# Altium PCB main_old.PcbDoc (part 12 of 15)
Units mil, origin at the board's own origin, x right, y up, seen from the top; angles counter-clockwise.
Board outline 8394.55 x 5164.44 mil, 7 copper layers (Top Layer 1, Layer 2, Layer 3, Unused, Layer 4_pow, Layer 5_gnd, Bottom 6+gnd), stack 46.112 mil thick; 363 components, 409 nets, 1750 pads, 991 vias.
Unrouted connection lines stored in the file: 1.
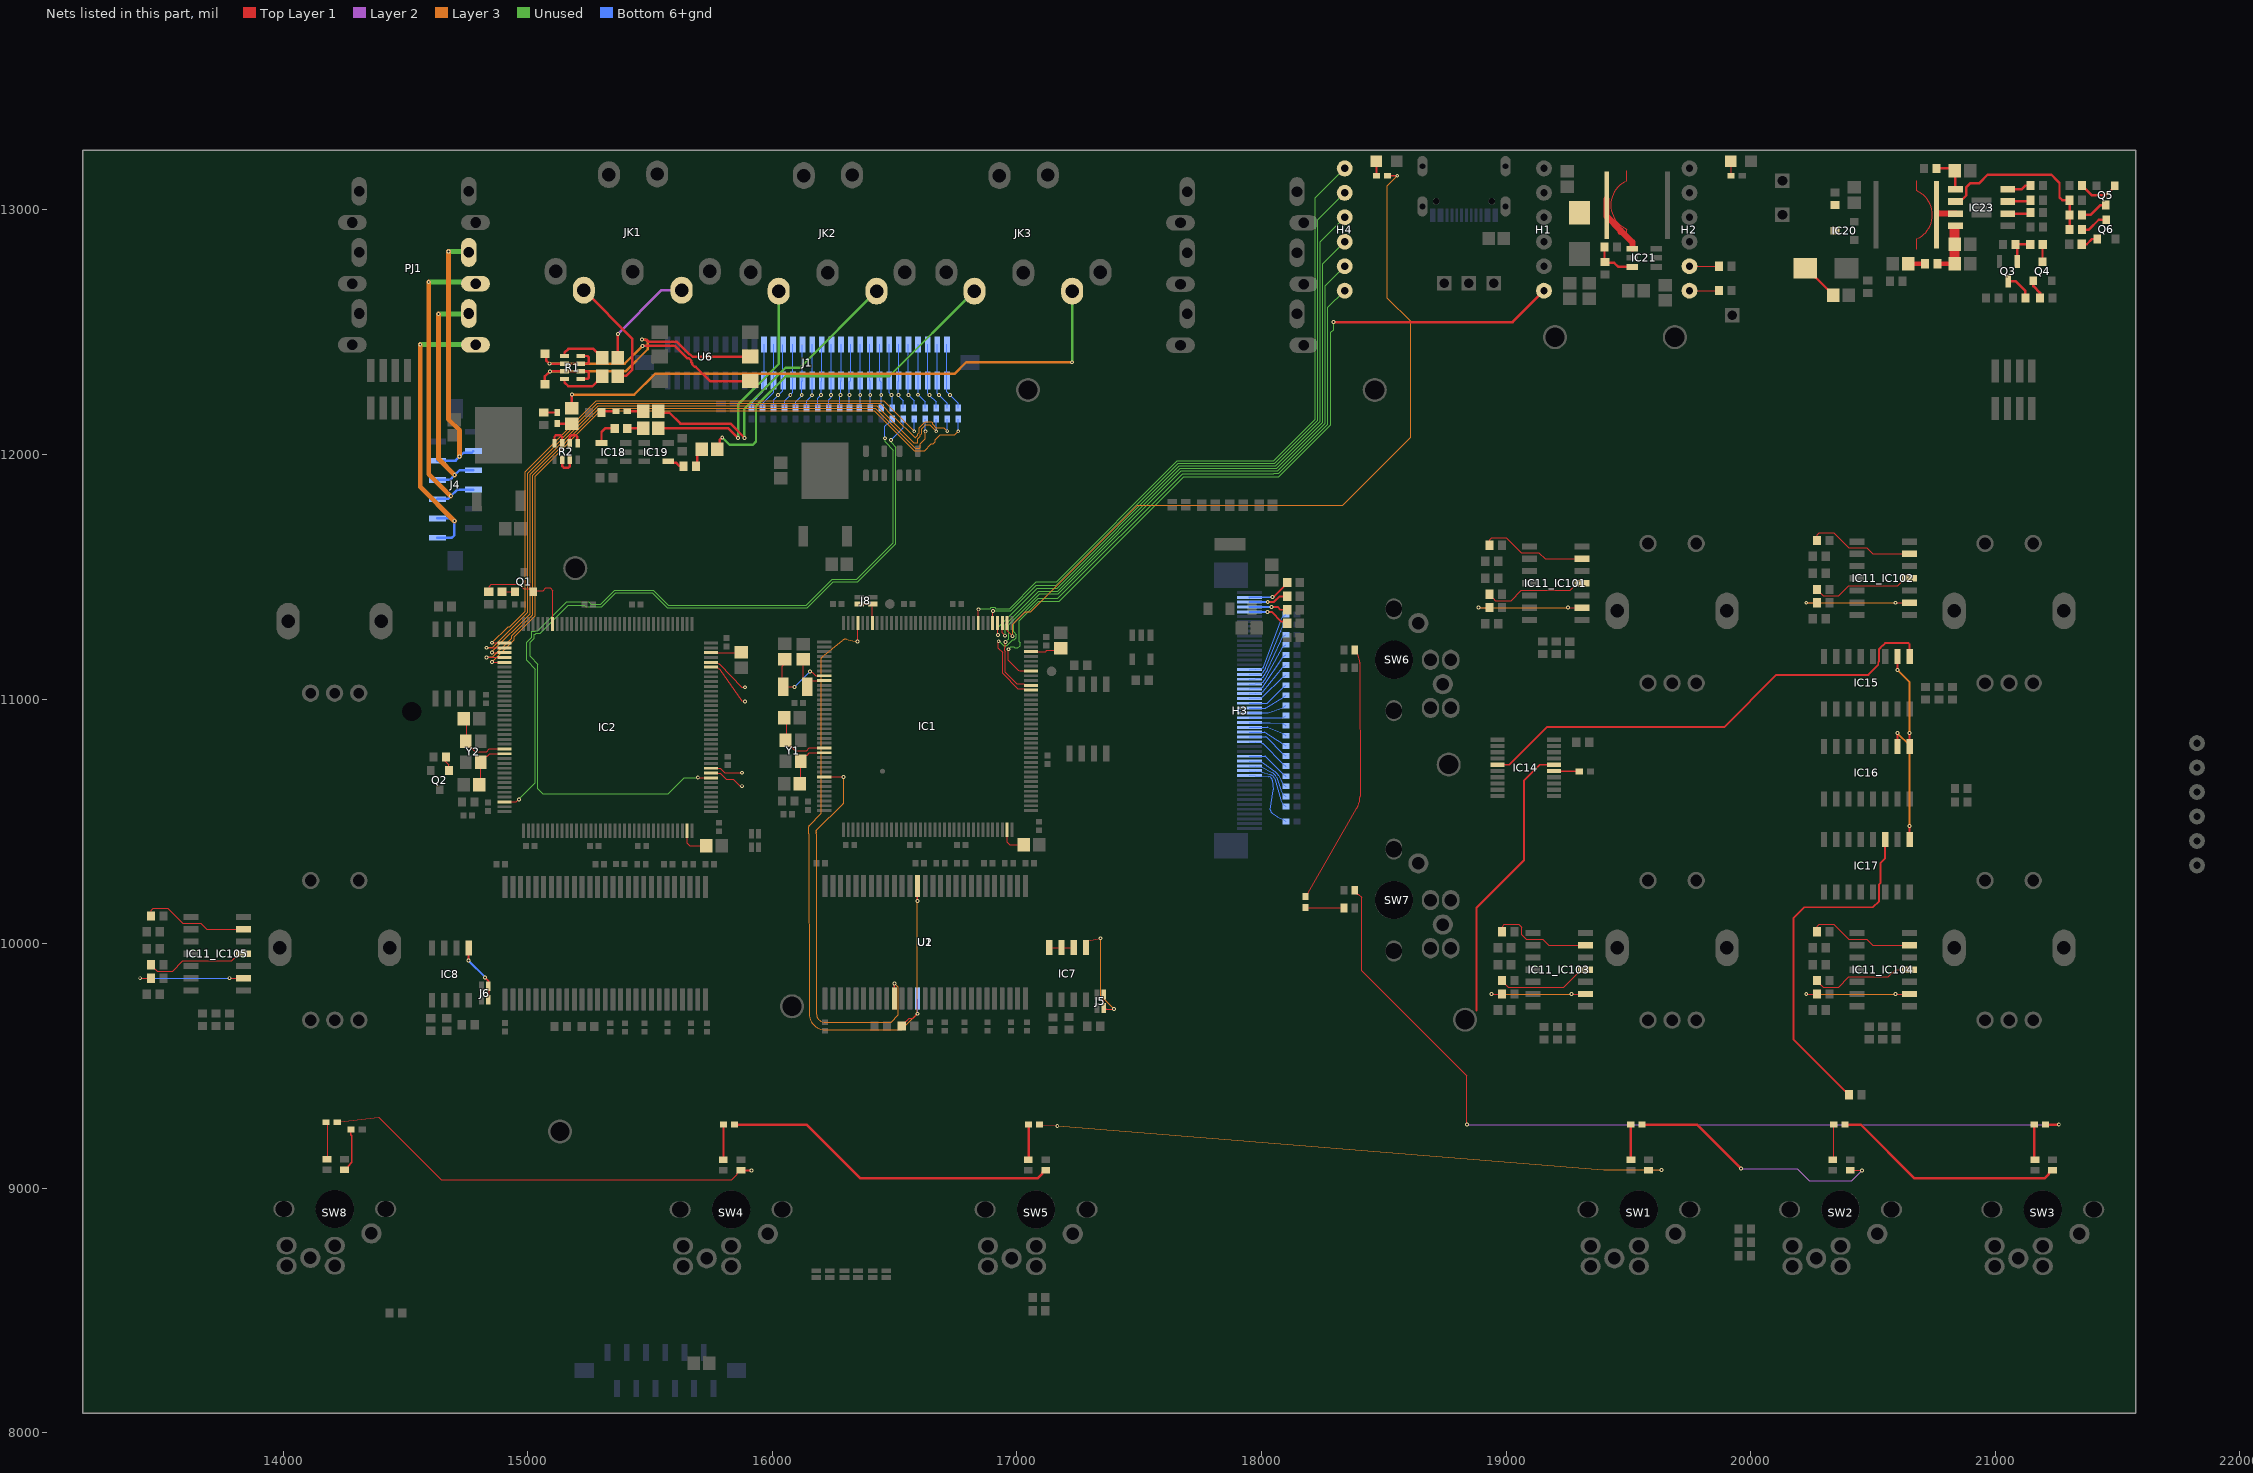
[diagram p15: the nets of this part, all layers, seen from the top]

## Via types
v1: diameter 15.75, hole 7.87, Top Layer 1 to Bottom 6+gnd, tented both sides, 923 vias
v2: diameter 27.56, hole 11.81, Top Layer 1 to Bottom 6+gnd, 45 vias
v3: diameter 23.62/23.62/23.62/23.62/23.62/23.62/23.62 (per signal layer), hole 12, Top Layer 1 to Bottom 6+gnd, tented top, 10 vias
v4: diameter 15.75, hole 7.87, Top Layer 1 to Bottom 6+gnd, 10 vias
v5: diameter 23.62/23.62/23.62/23.62/23.62/23.62/23.62 (per signal layer), hole 12, Top Layer 1 to Bottom 6+gnd, tented bottom, 3 vias

## Nets (pads, with @x,y where several pads share a name; then routed paths per layer and width w, separated by ;. In a path a pad name is that pad's centre, name@x,y a point inside that pad or via, vN(x,y) a via of type N, cw(c..) or ccw(c..) an arc to the next point about the centre after c; other vN are vias at no path point) (continued)
LDQM_6: IC1.141 R7.2 U1.15 U2.15 | length 3172.6
  Top Layer 1 w5: v1(16347.28,11235.1) 16348.42,11236.24 16348.42,11310.43 IC1.141@16349.57,11311.57 ; R7.2@16528.82,9663.82 16528.82,9665.79 16558.76,9695.73 16575.49,9695.73 v1(16593.26,9713.5) ; v1(16593.26,10174.13) U1.15@16593.26,10235.97 ; v1@16593.5,10174.38 U1.15@16593.5,10236.22
  Layer 3 w5: 16202.51,11170.57 16288.48,11241.21 ; 16202.51,11170.58 ccw(c16205.68,11166.71) 16200.68,11166.71 16200.68,10533.17 16150.01,10482.5 ccw(c16153.55,10478.97) 16148.55,10478.97 16148.55,10450.26 16150.05,9713.46 ccw(c16215.42,9713.62) 16215.17,9648.24 16246.56,9648.13 16481.47,9647.93 ; v1(16347.28,11235.1) 16301.28,11244.4 ; 16481.48,9647.93 16525.62,9647.93 ccw(c16525.62,9652.93) 16529.15,9649.4 v1(16593.26,9713.5) v1(16593.26,10174.13) ; 16288.48,11241.21 cw(c16298.24,11229.33) 16301.28,11244.4 ; 16288.48,11241.21 cw(c16298.24,11229.33) 16301.28,11244.4 ; 16288.48,11241.21 cw(c16298.24,11229.33) 16301.28,11244.4 ; 16288.48,11241.21 cw(c16298.24,11229.33) 16301.28,11244.4 ; 16288.48,11241.21 cw(c16298.24,11229.33) 16301.28,11244.4 ; 16288.48,11241.21 cw(c16298.24,11229.33) 16301.28,11244.4 ; 16288.48,11241.21 cw(c16298.24,11229.33) 16301.28,11244.4 ; 16288.48,11241.21 cw(c16298.24,11229.33) 16301.28,11244.4 ; 16288.48,11241.21 cw(c16298.24,11229.33) 16301.28,11244.4 ; 16288.48,11241.21 cw(c16298.24,11229.33) 16301.28,11244.4 ; 16288.48,11241.21 cw(c16298.24,11229.33) 16301.28,11244.4 ; 16288.48,11241.21 cw(c16298.24,11229.33) 16301.28,11244.4 ; 16288.48,11241.21 cw(c16298.24,11229.33) 16301.28,11244.4 ; 16288.48,11241.21 cw(c16298.24,11229.33) 16301.28,11244.4 ; 16288.48,11241.21 cw(c16298.24,11229.33) 16301.28,11244.4 ; 16288.48,11241.21 cw(c16298.24,11229.33) 16301.28,11244.4
  Bottom 6+gnd w5: v1@16593.5,9713.75 U2.15@16593.5,9775.59
LED_REAR: IC1.110 R138.2 | length 3222.5
  Top Layer 1 w5: IC1.110@16959.8,11311.57 16959.8,11279.49 v1(16982.09,11257.2)
  Top Layer 1 w8: R138.2@18515.28,13140 v1(18555,13140)
  Layer 3 w5: v1(16982.09,11257.2) 16982.09,11306.23 17033.14,11357.28 17056.45,11357.28 17491.19,11792.02 18332.02,11792.02 18610,12070 18610,12545 18515,12640 18515,13100 v1(18555,13140)
MISO: IC14.5 IC15.9 | length 1980
  Top Layer 1 w8: IC14.5@18964.33,10731.61 19012.8,10731.61 19166.87,10885.69 19891.87,10885.69 20105,11098.82 20481.04,11098.82 20521.8,11139.58 20521.8,11150.61 20525,11153.82 20525,11204.85 20538.58,11218.44 20539.62,11218.44 20550,11228.82 20645,11228.82 20650,11223.82 IC15.9@20650,11173.82
MOSI: IC14.16 | length 1170.6
  Top Layer 1 w8: 18878.99,9726.04 18878.99,10146.05 19073,10340.05 19073,10666.82 19137.8,10731.61 IC14.16@19195.67,10731.61
NetC1_1: C1.1 IC1.106 | length 127.8
  Top Layer 1 w5: IC1.106@17057.76,11193.94 17116.83,11193.94 17122.4,11199.51 17172.19,11199.51 C1.1@17180,11207.32
NetC2_1: C2.1 IC2.106 | length 127.8
  Top Layer 1 w5: IC2.106@15749.52,11189.75 15858.37,11189.75 C2.1@15871.76,11203.13
NetC3_2: C3.2 IC1.23 Y1.1 | length 277.5
  Top Layer 1 w5: C3.2@16058.5,10923.82 16058.5,10837.13 Y1.1@16053.5,10832.13 16053.5,10828.19 16092.87,10788.82 16140,10788.82 16151.42,10800.24 IC1.23@16212.24,10800.24
NetC4_2: C4.2 IC2.23 Y2.1 | length 277.5
  Top Layer 1 w5: C4.2@14750.26,10919.63 14750.26,10832.94 Y2.1@14745.26,10827.94 14745.26,10824 14784.63,10784.63 14831.76,10784.63 14843.18,10796.05 IC2.23@14904,10796.05
NetC5_2: C5.2 IC1.24 Y1.3 | length 204.3
  Top Layer 1 w5: C5.2@16116.5,10653.82 Y1.3@16116.5,10745.51 16116.5,10749.45 16137.62,10770.57 16141.56,10770.57 16151.54,10780.55 IC1.24@16212.24,10780.55
NetC6_2: C6.2 IC2.24 Y2.3 | length 204.3
  Top Layer 1 w5: C6.2@14808.26,10649.63 Y2.3@14808.26,10741.32 14808.26,10745.26 14829.38,10766.38 14833.31,10766.38 14843.29,10776.36 IC2.24@14904,10776.36
NetC9_2: C9.2 IC1.71 | length 135.2
  Top Layer 1 w5: IC1.71@16960,10466.26 IC1.71@16959.8,10466.06 16959.8,10414.01 16970,10403.82 C9.2@17038.5,10403.82
NetC10_2: C10.2 IC2.71 | length 135
  Top Layer 1 w5: IC2.71@15651.56,10461.87 15651.56,10409.83 15661.76,10399.63 C10.2@15730.26,10399.63
NetC67_2: C67.2 IC1.8 Y3.2 | length 296.6
  Top Layer 1 w5: Y3.2@16040.75,11052.67 16040.75,11134.44 C67.2@16050.98,11144.66 ; Y3.2@16043.87,11050.2 16044.34,11049.74 v1(16089.83,11049.74) ; v1(16153.3,11112.31) 16155.25,11110.36 16163.09,11110.36 16177.93,11095.51 IC1.8@16212.24,11095.51
  Bottom 6+gnd w5: v1@16090.83,11049.74 v1@16153.3,11112.21
NetC68_2: C68.2 IC1.9 Y3.1 | length 182.6
  Top Layer 1 w5: C68.2@16126.41,11145 16126.41,11065.43 16139.18,11052.67 16139.18,11056.67 16158.33,11075.83 IC1.9@16212.24,11075.83
NetC92_2: C92.2 D2.2 IC20.3 R18.2 | length 164
  Top Layer 1 w10: D2.2@20222.72,12762.1 20228.63,12762.1 20265.95,12724.78 20265.95,12723.54 20337.52,12651.97 C92.2@20337.52,12650
  Top Layer 1 w25: R18.2@20344.02,13020 R18.2@20344.33,13019.68 ; IC20.3@20344.33,12915.32 IC20.3@20344.65,12915
NetC93_2: C93.2 C94.2 IC23.8 R53.2 | length 210
  Top Layer 1 w20: R53.2@20764.02,12780 C94.2@20834.02,12780
  Top Layer 1 w40: C94.2@20834.02,12780 C93.2@20834.02,12860 20834.02,12920
NetC95_2: C95.2 R53.1 | length 68.8
  Top Layer 1 w20: C95.2@20644.02,12780 R53.1@20712.83,12780
NetC96_2: C96.2 IC23.5 R125.1 | length 154.9
  Top Layer 1 w10: R125.1@20759.61,13170 20824.02,13170 C96.2@20834.02,13160 20837.24,13156.77 IC23.5@20837.24,13085
NetD1_1: D1.1 R1.7 U6.2 | length 1087.7
  Top Layer 1 w10: D1.1@15070,12287.99 15070,12320 v1(15090,12340) R1.7@15150,12340 ; v1(15466.75,12470.31) 15485.1,12470.31 15494.97,12460.44 15609.76,12460.44 15661.14,12409.06 15664.33,12409.06 15673.38,12400 U6.2@15910.04,12400
  Layer 3 w10: v1(15090,12340) 15400,12340 15490.57,12430.57 15490.57,12458.94 15480.3,12469.21 15467.85,12469.21 v1(15466.75,12470.31)
NetD1_2: D1.2 R1.6 U6.1 | length 1028.6
  Top Layer 1 w10: D1.2@15070,12412.01 15074.85,12407.16 15074.85,12385.15 v1(15088.5,12371.5) R1.6@15150,12371.5 ; v1(15469.37,12444.37) 15470.44,12445.44 15599.56,12445.44 15650.94,12394.06 15658.11,12394.06 15668.58,12383.58 15668.58,12376.42 15672.2,12372.8 15672.2,12368.78 15682.68,12358.31 15686.69,12358.31 15745,12300 U6.1@15910.04,12300
  Layer 3 w10: v1(15088.5,12371.5) 15396.5,12371.5 v1(15469.37,12444.37)
NetD3_1: D3.1 IC21.1 L1.2 | length 252.7
  Top Layer 1 w25: L1.2@19410.79,13044.99 19410.79,12974.01 19469.03,12915.77 ; 19469.03,12909.99 19469.03,12915.77 ; IC21.1@19516.38,12841.81 19516.38,12868.42 19469.03,12915.77
NetD4_1: D4.1 R132.1 | length 60.6
  Top Layer 1 w5: D4.1@19918.66,13200 19920,13198.66 R132.1@19920,13140
NetD5_1: D5.1 R138.1 | length 60
  Top Layer 1 w8: R138.1@18470,13140 D5.1@18470,13200
NetFB1_1: FB1.1 JK1.5 | length 433.1
  Top Layer 1 w10: FB1.1@15367.99,12395 v1(15367.99,12492.99)
  Layer 2 w10: v1(15367.99,12492.99) 15547,12672 JK1.5@15628.93,12672
NetFB1_2: FB1.2 R1.5 | length 191.1
  Top Layer 1 w10: R1.5@15150,12402.99 15150,12416.5 15165.61,12432.11 15268.27,12432.11 15282.82,12417.56 15284.41,12417.56 15305,12396.97 FB1.2@15305,12395.38
NetFB2_1: FB2.1 JK1.4 | length 477.9
  Top Layer 1 w10: JK1.4@15228.93,12672 15427.83,12473.1 15427.83,12425.39 15427.83,12347.83 15402.72,12322.72 15370.72,12322.72 FB2.1@15367.99,12320
NetFB2_2: FB2.2 R1.8 | length 192.9
  Top Layer 1 w10: R1.8@15150,12308.5 15150,12295 15165.61,12279.39 15264.39,12279.39 15282.44,12297.44 15284.41,12297.44 15305,12318.03 FB2.2@15305,12320
NetFB3_1: FB3.1 R102.2 | length 65
  Top Layer 1 w10: R102.2@15406.2,12107.11 FB3.1@15471.2,12107.11
NetFB3_2: FB3.2 JK2.4 | length 1010.1
  Top Layer 1 w10: FB3.2@15534.19,12107.11 15820.56,12107.11 v1(15859.46,12068.2)
  Unused w10: v1(15859.46,12068.2) 15859.46,12204.46 16025.93,12370.93 JK2.4@16025.93,12668
NetFB4_1: FB4.1 R104.2 | length 65
  Top Layer 1 w10: R104.2@15406.2,12177.11 FB4.1@15471.2,12177.11
NetFB4_2: FB4.2 JK2.5 | length 1256.5
  Top Layer 1 w10: FB4.2@15534.19,12177.11 15539.6,12171.7 15578.34,12171.7 15623.74,12126.3 15828.7,12126.3 15882.53,12072.47 15882.53,12072.14 15885.4,12069.27 v1(15885.4,12067.71)
  Unused w10: v1(15885.4,12067.71) 15885,12068.11 15885,12185.74 16054.26,12355 16112.93,12355 JK2.5@16425.93,12668
NetFB5_1: FB5.1 R105.2 | length 79.9
  Top Layer 1 w10: R105.2@15687.38,11952.31 15693.52,11958.45 15693.52,12004.63 FB5.1@15711.2,12022.31
NetFB5_2: FB5.2 JK3.4 | length 1449
  Top Layer 1 w5: FB5.2@15771.31,12025.19 FB5.2@15774.19,12022.31
  Top Layer 1 w10: FB5.2@15774.19,12022.31 15784.01,12032.12 15784.01,12059.01 v1(15795,12070)
  Unused w10: v1(15795,12070) 15825,12040 15920.28,12040 15932.87,12052.6 15932.87,12197.87 16055,12320 16477.93,12320 JK3.4@16825.93,12668
NetFB6_1: FB6.1 R140.2 | length 60.1
  Top Layer 1 w10: R140.2@15120,12126.54 15179.72,12126.54 FB6.1@15180,12126.81
NetFB6_2: FB6.2 JK3.5 | length 2449
  Top Layer 1 w10: v1(15180,12245) FB6.2@15180,12189.8 FB6.2@15180.93,12190.73 ; JK3.5@17225,12667.07 JK3.5@17225.93,12668
  Unused w10: v1(17225.36,12377.26) 17225.36,12667.43 JK3.5@17225.93,12668
  Layer 3 w10: v1(15180,12245) 15435,12245 15520,12330 16745,12330 16792.26,12377.26 v1(17225.36,12377.26)
NetH2_5: H2.5 R135.2 | length 120.2
  Top Layer 1 w5: H2.5@19749.81,12770 R135.2@19870,12770
NetH2_6: H2.6 R136.2 | length 120.2
  Top Layer 1 w5: H2.6@19749.81,12670 R136.2@19870,12670
NetH3_12: H3.12 R137.1 | length 306.1
  Bottom 6+gnd w5: H3.12@17950,10687.6 17998.68,10684.19 18030.02,10682.18 cw(c18029.04,10666.84) 18044.37,10667.98 18047.17,10630.14 cw(c18031.83,10629) 18047.07,10626.99 18036.62,10548.01 ccw(c18051.86,10545.99) 18043.33,10533.2 18062.38,10520.5 ccw(c18067.93,10528.82) 18063.94,10519.65 18087.74,10509.31 R137.1@18100,10500
NetH3_13: H3.13 R40.1 | length 238.9
  Bottom 6+gnd w5: H3.13@17950,10707.28 17998.68,10703.88 18037.16,10690.88 cw(c18029.04,10666.84) 18053.42,10673.86 18078.03,10588.3 ccw(c18085.24,10590.38) 18078.66,10586.78 18087.74,10570.19 R40.1@18100,10560.87
NetH3_14: H3.14 R41.1 | length 215.9
  Bottom 6+gnd w5: H3.14@17950,10726.97 17998.68,10723.56 18045.91,10697.93 cw(c18029.04,10666.84) 18062.74,10677.58 18078.09,10629.42 ccw(c18085.24,10631.69) 18078.66,10628.09 18087.74,10611.5 R41.1@18100,10602.19
NetH3_15: H3.15 R54.1 | length 194.2
  Bottom 6+gnd w5: H3.15@17950,10746.65 17998.68,10743.25 18005.13,10739.25 cw(c18001.18,10732.87) 18005.51,10739 18055.21,10703.91 cw(c18029.04,10666.84) 18069.46,10687.44 18078.55,10669.6 ccw(c18085.24,10673.01) 18078.66,10669.41 18087.74,10652.82 R54.1@18100,10643.5
NetH3_16: H3.16 R55.1 | length 182.8
  Bottom 6+gnd w5: H3.16@17950,10766.34 18013.46,10766.34 cw(c18013.46,10761.34) 18016.98,10764.89 18087.74,10694.13 R55.1@18100,10684.82
NetH3_19: H3.19 R56.1 | length 188.6
  Bottom 6+gnd w5: H3.19@17950,10825.39 17998.68,10821.99 18005.13,10817.99 cw(c18001.18,10811.61) 18006.49,10816.91 18087.74,10735.45 R56.1@18100,10726.14
NetH3_20: H3.20 R57.1 | length 181.2
  Bottom 6+gnd w5: H3.20@17950,10845.08 18017.35,10845.08 cw(c18017.35,10840.08) 18020.87,10843.63 18087.74,10776.76 R57.1@18100,10767.45
NetH3_21: H3.21 R58.1 | length 166.3
  Bottom 6+gnd w5: H3.21@17950,10864.76 18010.29,10864.76 cw(c18010.29,10859.76) 18012.91,10864.03 18087.74,10818.08 R58.1@18100,10808.77
NetH3_22: H3.22 R59.1 | length 157.9
  Bottom 6+gnd w5: H3.22@17950,10884.45 18023.96,10884.45 cw(c18023.96,10879.45) 18025.79,10884.1 18087.74,10859.4 R59.1@18100,10850.08
NetH3_23: H3.23 R60.1 | length 153.2
  Bottom 6+gnd w5: H3.23@17950,10904.13 18034.77,10904.13 cw(c18034.77,10899.13) 18035.06,10904.13 18087.74,10900.71 R60.1@18100,10891.4
NetH3_24: H3.24 R61.1 | length 152.9
  Bottom 6+gnd w5: H3.24@17950,10923.82 18087.74,10923.82 R61.1@18100,10932.71
NetH3_25: H3.25 R62.1 | length 156.7
  Bottom 6+gnd w5: H3.25@17950,10943.5 18025.87,10943.5 ; 18025.91,10943.51 ccw(c18025.84,10948.51) 18027.48,10943.78 18087.74,10964.72 R62.1@18100,10974.03
NetH3_26: H3.26 R63.1 | length 165.1
  Bottom 6+gnd w5: H3.26@17950,10963.19 18015.98,10963.19 ccw(c18015.95,10968.19) 18018.55,10963.92 18087.74,11006.04 R63.1@18100,11015.35
NetH3_27: H3.27 R64.1 | length 179.6
  Bottom 6+gnd w5: H3.27@17950,10982.87 18021.19,10982.87 ; 18021.22,10982.88 ccw(c18021.16,10987.88) 18024.69,10984.34 18087.74,11047.35 R64.1@18100,11056.66
NetH3_28: H3.28 R65.1 | length 185.9
  Bottom 6+gnd w5: H3.28@17950,11002.56 17998.68,11005.97 18005.13,11009.96 ccw(c18001.18,11016.34) 18006.36,11010.92 18087.74,11088.67 R65.1@18100,11097.98
NetH3_29: H3.29 R66.1 | length 201.8
  Bottom 6+gnd w5: H3.29@17950,11022.24 17998.68,11025.65 18005.13,11029.65 ccw(c18001.18,11036.03) 18006.99,11031.28 18087.74,11129.98 R66.1@18100,11139.29
NetH3_30: H3.30 R67.1 | length 219.2
  Bottom 6+gnd w5: H3.30@17950,11041.93 17998.68,11045.34 18005.13,11049.33 ccw(c18001.18,11055.71) 18007.41,11051.53 18087.74,11171.3 R67.1@18100,11180.61
NetH3_31: H3.31 R68.1 | length 237.6
  Bottom 6+gnd w5: H3.31@17950,11061.61 17998.68,11065.02 18005.13,11069.02 ccw(c18001.18,11075.4) 18007.64,11071.59 18016.25,11086.19 18033.48,11115.4 ccw(c18001.18,11134.45) 18033.9,11116.12 18087.74,11212.61 R68.1@18100,11221.92
NetH3_32: H3.32 R69.1 | length 256.9
  Bottom 6+gnd w5: H3.32@17950,11081.3 17998.68,11084.71 18005.13,11088.7 ccw(c18001.18,11095.08) 18007.64,11091.27 18024.87,11120.48 ccw(c18001.18,11134.45) 18026.18,11122.98 18078.42,11236.86 cw(c18085.24,11233.74) 18078.66,11237.34 18087.74,11253.93 R69.1@18100,11263.24
NetH3_33: H3.33 R70.1 | length 276.6
  Bottom 6+gnd w5: H3.33@17950,11100.98 17998.68,11104.39 18005.13,11108.39 ccw(c18001.18,11114.77) 18007.64,11110.96 18016.25,11125.56 ccw(c18001.18,11134.45) 18017.4,11127.87 18078.29,11277.87 cw(c18085.24,11275.05) 18078.66,11278.65 18087.74,11295.25 R70.1@18100,11304.56
NetH3_34: H3.34 R71.1 | length 296.5
  Bottom 6+gnd w5: H3.34@17950,11120.67 17998.68,11124.08 18005.13,11128.07 ccw(c18001.18,11134.45) 18008.21,11131.82 18078.21,11319 cw(c18085.24,11316.37) 18078.66,11319.97 18087.74,11336.56 R71.1@18100,11345.87
NetH3_46: H3.46 R42.1 | length 174.4
  Top Layer 1 w8: v1(18024.85,11356.23) 18041.17,11356.23 18080.42,11316.98 18098.75,11316.98 R42.1@18105.42,11310.32
  Bottom 6+gnd w8: H3.46@17950,11356.89 17997.18,11356.23 v1(18024.85,11356.23)
NetH3_47: H3.47 R43.1 | length 160.7
  Top Layer 1 w8: v1(18040.87,11376.39) 18041.47,11376.98 18065.42,11376.98 18077.08,11365.32 R43.1@18105.42,11365.32
  Bottom 6+gnd w8: H3.47@17950,11376.57 17950.21,11376.78 18040.47,11376.78 v1(18040.87,11376.39)
NetH3_48: H3.48 R44.1 | length 165.4
  Top Layer 1 w8: v1(18025.42,11396.98) 18050.42,11396.98 18073.75,11420.32 R44.1@18105.42,11420.32
  Bottom 6+gnd w8: H3.48@17950,11396.26 18024.69,11396.26 v1(18025.42,11396.98)
NetH3_49: H3.49 R45.1 | length 182.9
  Top Layer 1 w8: v1(18045.42,11416.98) 18046.9,11418.47 18050.64,11418.47 18092.69,11460.51 18092.69,11464.25 R45.1@18105.42,11476.98
  Bottom 6+gnd w8: H3.49@17950,11415.94 17950.52,11416.46 18044.9,11416.46 v1(18045.42,11416.98)
NetIC1_138: IC1.138 J8.1 J8.3 | length 132.9
  Top Layer 1 w5: J8.3@16354.88,11388.82 J8.1@16410,11388.82 16408.62,11387.44 IC1.138@16408.62,11311.57
NetIC2_81: IC2.81 TP4.1 | length 147.8
  Top Layer 1 w5: IC2.81@15749.52,10697.62 15786.2,10697.62 15810.57,10673.24 15839.11,10673.24 15868.54,10643.82 v1(15875,10643.82)
NetIC2_82: IC2.82 TP3.1 | length 133.1
  Top Layer 1 w5: IC2.82@15749.52,10717.31 15786.51,10717.31 15805,10698.82 v1(15875,10698.82)
NetIC2_103: IC2.103 TP6.1 | length 206.6
  Top Layer 1 w5: IC2.103@15749.52,11130.69 15776.05,11127.29 15782.5,11123.29 cw(c15778.55,11116.91) 15784.67,11121.25 15875,10993.82 v1(15887.31,10989.49)
NetIC2_104: IC2.104 TP5.1 | length 178.7
  Top Layer 1 w5: IC2.104@15749.52,11150.38 15776.05,11146.97 15782.5,11142.97 cw(c15778.55,11136.6) 15783.91,11141.85 15875,11048.82 v1(15887.31,11048.51)
NetIC2_138: IC2.138 Q1.2 R109.1 | length 446.1
  Top Layer 1 w5: R109.1@14840,11438.82 14841.3,11440.12 14841.3,11460.12 14850,11468.82 14966.08,11468.82 14983.64,11451.26 15010.59,11451.26 Q1.2@15022.4,11439.45 15026.77,11443.82 15062.02,11443.82 15072.57,11454.36 15091.17,11454.36 15102.43,11443.1 15102.43,11309.43 IC2.138@15100.38,11307.38
NetIC7_1: IC7.1 J5.2 J5.4 | length 486.4
  Top Layer 1 w5: IC7.1@17282.09,9983.98 17292.38,10011.5 v1(17342.09,10022.2) ; J5.4@17354.65,9737.09 J5.2@17354.65,9792.2 ; J5.4@17360.87,9737.2 17365.87,9732.2 v1(17397.09,9732.2)
  Layer 3 w5: v1(17342.09,10022.2) 17342.09,9787.2 v1(17397.09,9732.2)
NetIC7_2: IC7.2 IC7.3 IC7.4 | length 100
  Top Layer 1 w5: IC7.4@17132.09,9983.98 IC7.2@17232.09,9983.98
NetIC8_1: IC8.1 J6.2 J6.4 | length 245.9
  Top Layer 1 w8: v1(14757.33,9931.26) 14757.33,9981.03 IC8.1@14758.33,9982.03 ; v1(14825.33,9861.26) 14838.33,9848.26 J6.2@14838.33,9825.26 J6.4@14838.33,9770.14
  Bottom 6+gnd w8: v1(14757.33,9931.26) 14757.33,9930.26 14825.33,9862.26 v1(14825.33,9861.26)
NetIC14_15: IC14.15 R76.2 | length 105.2
  Top Layer 1 w8: IC14.15@19195.67,10706.02 19196.77,10704.92 19298.9,10704.92 R76.2@19300,10703.82
NetIC15_10: IC15.10 IC16.9 | length 388.4
  Top Layer 1 w8: v1(20600,11119.25) IC15.10@20600,11173.82 ; IC16.9@20650,10806.1 v1(20650,10860.67)
  Layer 3 w8: v1(20600,11119.25) 20650,11069.25 v1(20650,10860.67)
NetIC16_10: IC16.10 IC17.9 | length 509.8
  Top Layer 1 w8: IC16.10@20600,10806.1 v1(20600,10860.67) ; IC17.9@20650,10426.1 v1(20650,10480.67)
  Layer 3 w8: v1(20600,10860.67) 20650,10810.67 v1(20650,10480.67)
NetIC17_11: IC17.11 R86.1 | length 1457.2
  Top Layer 1 w8: R86.1@20401.64,9382.18 20175,9608.82 20175,10103.82 20220,10148.82 20500,10148.82 20525,10173.82 20525,10242.57 20530,10247.57 20530,10328.82 20550,10348.82 IC17.11@20550,10426.1
NetIC18_4: IC18.4 R102.1 | length 105
  Top Layer 1 w10: IC18.4@15301.2,12047.11 15301.2,12092.11 15316.2,12107.11 R102.1@15355.02,12107.11
NetIC19_4: IC19.4 R105.1 | length 69.9
  Top Layer 1 w10: IC19.4@15574.63,11972.31 15579.94,11966.99 15605.96,11966.99 15618.58,11954.37 15634.13,11954.37 R105.1@15636.2,11952.31
NetIC21_3: IC21.3 R17.1 R20.2 | length 182.3
  Top Layer 1 w10: R20.2@19402.28,12848.61 19402.28,12789.93 19407.8,12784.4 19441.75,12784.4 19459.15,12767 IC21.3@19516.38,12767
NetIC23_2: IC23.2 R52.1 | length 95.3
  Top Layer 1 w10: IC23.2@21050.79,12985 21139.02,12985 R52.1@21144.02,12990
NetIC23_3: IC23.3 R127.1 | length 95.3
  Top Layer 1 w10: IC23.3@21050.79,13035 21139.02,13035 R127.1@21144.02,13040
NetIC23_4: IC23.4 R128.2 | length 99.4
  Top Layer 1 w10: IC23.4@21050.79,13085 21109.02,13085 21124.02,13100 R128.2@21144.02,13100
NetIC23_6: IC23.6 R129.2 R130.2 R131.2 | length 729.6
  Top Layer 1 w10: IC23.6@20837.24,13035 20846.02,13043.78 20866.01,13043.78 20882.26,13060.03 20882.26,13093.25 20899.02,13110 20935.07,13110 20969.44,13144.38 21228.94,13144.38 21252.09,13121.22 21252.22,13121.22 21262.8,13110.65 21262.8,13051.22 21274.02,13040 R129.2@21304.02,13040 R130.2@21304.02,12980 R131.2@21304.02,12920
NetIC23_7: IC23.7 L2.1 | length 75.3
  Top Layer 1 w25: L2.1@20764.02,12990 20769.02,12985 IC23.7@20837.24,12985
NetJ1_1: J1.1 J1.2 R141.2 | length 279.2
  Bottom 6+gnd w5: J1.2@16713.7,12450 J1.1@16713.7,12302.36 16713.7,12256.3 v1(16726.81,12243.19) 16760,12210 R141.2@16760,12190
NetJ1_3: J1.3 J1.4 R142.2 | length 276.8
  Bottom 6+gnd w5: J1.4@16674.33,12450 J1.3@16674.33,12302.36 16674.33,12250.67 v1(16681.81,12243.19) 16715,12210 R142.2@16715,12190
NetJ1_5: J1.5 J1.6 R143.2 | length 274.5
  Bottom 6+gnd w5: J1.6@16634.96,12450 J1.5@16634.96,12302.36 16634.96,12250.04 v1(16641.81,12243.19) 16670,12215 R143.2@16670,12190
NetJ1_7: J1.7 J1.8 R144.2 | length 272.2
  Bottom 6+gnd w5: J1.8@16595.59,12450 J1.7@16595.59,12302.36 v1(16595.59,12244.41) 16625,12215 R144.2@16625,12190
NetJ1_9: J1.9 J1.10 R145.2 | length 269.8
  Bottom 6+gnd w5: J1.10@16556.22,12450 J1.9@16556.22,12302.36 v1(16556.22,12243.78) 16580,12220 R145.2@16580,12190
NetJ1_11: J1.11 J1.12 R146.2 | length 269.1
  Bottom 6+gnd w5: J1.12@16516.85,12450 J1.11@16516.85,12302.36 16515,12300.51 v1(16515,12243.19) 16515,12240 16535,12220 R146.2@16535,12190
NetJ1_13: J1.13 J1.14 R147.2 | length 265.2
  Bottom 6+gnd w5: J1.14@16477.48,12450 J1.13@16477.48,12302.36 16477.48,12252.52 v1(16486.81,12243.19) 16490,12240 R147.2@16490,12190
NetJ1_15: J1.15 J1.16 R148.2 | length 262.9
  Bottom 6+gnd w5: J1.16@16438.11,12450 J1.15@16438.11,12302.36 16445,12295.47 v1(16445,12243.19) R148.2@16445,12190
NetJ1_17: J1.17 J1.18 R149.2 | length 260.5
  Bottom 6+gnd w5: J1.18@16398.74,12450 J1.17@16398.74,12302.36 16400,12301.1 v1(16400,12243.19) R149.2@16400,12190
NetJ1_19: J1.19 J1.20 R150.2 | length 261.8
  Bottom 6+gnd w5: R150.2@16355,12190 16359.37,12194.37 v1(16359.37,12243.19) J1.19@16359.37,12302.36 J1.20@16359.37,12450
NetJ1_21: J1.21 J1.22 R151.2 | length 262.1
  Bottom 6+gnd w5: R151.2@16315,12190 v1(16315,12243.19) 16315,12297.36 J1.21@16320,12302.36 J1.22@16320,12450
NetJ1_23: J1.23 J1.24 R152.2 | length 262.3
  Bottom 6+gnd w5: R152.2@16275,12190 16275,12240 v1(16278.19,12243.19) 16280,12245 16280,12301.73 J1.23@16280.63,12302.36 J1.24@16280.63,12450
NetJ1_25: J1.25 J1.26 R153.2 | length 264.7
  Bottom 6+gnd w5: R153.2@16230,12190 16230,12225 16240,12235 v1(16240,12243.19) 16240,12301.1 J1.25@16241.26,12302.36 J1.26@16241.26,12450
NetJ1_27: J1.27 J1.28 R154.2 | length 267
  Bottom 6+gnd w5: R154.2@16185,12190 16185,12230 v1(16198.19,12243.19) 16200,12245 16200,12300.47 J1.27@16201.89,12302.36 J1.28@16201.89,12450
NetJ1_29: J1.29 J1.30 R155.2 | length 269.3
  Bottom 6+gnd w5: R155.2@16140,12190 16140,12220 v1(16162.52,12242.52) J1.29@16162.52,12302.36 J1.30@16162.52,12450
NetJ1_31: J1.31@16123.15,12302.36 J1.32@16123.15,12450 R156.2 | length 271.7
  Bottom 6+gnd w5: R156.2@16095,12190 16095,12215 16120,12240 v1(16120,12243.19) 16120,12299.21 J1.31@16123.15,12302.36 ; J1.31@16121.57,12300.79 J1.32@16121.57,12448.43
NetJ1_33: J1.33 J1.34 R157.2 | length 274
  Bottom 6+gnd w5: R157.2@16050,12190 16050,12220 v1(16073.19,12243.19) 16083.78,12253.78 J1.33@16083.78,12302.36 J1.34@16083.78,12450
NetJ1_35: J1.35 J1.36 R158.2 | length 276.3
  Bottom 6+gnd w5: R158.2@16005,12190 16005,12225 v1(16023.19,12243.19) 16041.37,12261.37 16041.37,12299.33 J1.35@16044.41,12302.36 ; J1.35@16042.89,12300.84 J1.36@16042.89,12448.48
NetJ1_37: J1.37 J1.38 R159.2 | length 278.7
  Bottom 6+gnd w5: R159.2@15960,12190 15960,12210 16005.04,12255.04 J1.37@16005.04,12302.36 J1.38@16005.04,12450
NetJ1_39: J1.39 J1.40 R160.2 | length 281
  Bottom 6+gnd w5: R160.2@15915,12190 15915,12210.53 15963.4,12258.93 15963.4,12300.09 J1.39@15965.67,12302.36 J1.40@15965.67,12450
NetQ1_1: Q1.1 R106.2 | length 52.9
  Top Layer 1 w5: R106.2@14895,11438.82 14946.97,11438.82 Q1.1@14947.6,11439.45
NetQ2_1: Q2.1 R107.2 | length 66.7
  Top Layer 1 w5: R107.2@14662.64,10768.82 14662.64,10746.18 14677.4,10731.42 Q2.1@14677.4,10708.19
NetQ3_1: Q3.1 R21.1 R38.2 | length 132.5
  Top Layer 1 w10: Q3.1@21089.39,12789.37 21089.39,12853.37 R21.1@21083.39,12859.37 R38.2@21143.39,12859.37
NetQ3_3: Q3.3 R39.2 | length 116.6
  Top Layer 1 w10: Q3.3@21053.39,12709.37 21083.39,12709.37 21123.39,12669.37 R39.2@21123.39,12639.37
NetQ4_1: Q4.1 R50.1 | length 82
  Top Layer 1 w10: Q4.1@21155.98,12710 21155.98,12688.55 21183.39,12661.15 R50.1@21183.39,12639.37
NetQ4_3: Q4.3 R38.1 | length 71.1
  Top Layer 1 w10: Q4.3@21193.39,12788.74 21193.39,12858.19 R38.1@21194.57,12859.37
NetQ5_1: Q5.1 R133.2 | length 170.3
  Top Layer 1 w10: R133.2@21355.2,13100 21355.2,13098.03 21366.93,13086.3 21368.67,13086.3 21394,13060.97 21453.64,13060.97 21478.7,13086.02 21480.67,13086.02 21491.42,13096.77 Q5.1@21491.42,13098.74
NetQ5_3: Q5.3 R130.1 | length 115.4
  Top Layer 1 w10: R130.1@21355.2,12980 21390.34,12980 21430.34,13020 Q5.3@21454.02,13020
NetQ6_1: Q6.1 R134.2 | length 71.4
  Top Layer 1 w10: R134.2@21354.02,12860 21374.02,12860 21395.28,12881.26 Q6.1@21416.61,12881.26
NetQ6_3: Q6.3 R131.1 | length 115.4
  Top Layer 1 w10: R131.1@21355.2,12920 21383.08,12920 21423.08,12960 Q6.3@21454.02,12960
NetR1_1: R1.1 R1.2 | length 89.9
  Top Layer 1 w10: R1.1@15216.93,12308.5 15217.68,12309.25 15243.93,12309.25 15249.79,12315.11 15249.79,12334.14 15243.93,12340 R1.2@15216.93,12340
NetR1_3: R1.3 R1.4 | length 89.9
  Top Layer 1 w10: R1.3@15216.93,12371.5 15217.68,12372.24 15243.93,12372.24 15249.79,12378.1 15249.79,12397.13 15243.93,12402.99 R1.4@15216.93,12402.99
NetR2_2: R2.2 R2.3 | length 89.9
  Top Layer 1 w10: R2.2@15140.45,11978.65 15141.2,11977.9 15141.2,11951.64 15147.06,11945.78 15166.09,11945.78 15171.95,11951.64 R2.3@15171.95,11978.65
NetR2_5: R2.5 R2.6 | length 89.9
  Top Layer 1 w10: R2.6@15171.95,12045.57 15171.95,12072.58 15177.81,12078.44 15196.84,12078.44 15202.7,12072.58 15202.7,12046.32 R2.5@15203.45,12045.57
NetR2_7: R2.7 R2.8 | length 89.9
  Top Layer 1 w10: R2.8@15108.96,12045.57 15108.96,12072.58 15114.82,12078.44 15133.85,12078.44 15139.71,12072.58 15139.71,12046.32 R2.7@15140.45,12045.57
NetR3_1: R3.1 SW8.3 | length 180.8
  Top Layer 1 w6: SW8.3@14250.59,9075.38 14254.53,9075.38 14265.31,9086.16 14265.31,9090.59 14280,9105.29 14280,9215 14276.65,9218.35 14276.65,9239.29 R3.1@14277.36,9240
NetR4_1: R4.1 SW5.3 | length 1380.1
  Top Layer 1 w10: R4.1@15845.28,9260 16140,9260 16360,9040 17084.52,9040 17102.81,9058.28 17102.81,9062.22 17114.09,9073.5 SW5.3@17118.02,9073.5
NetR4_2: R4.2 SW4.1 | length 143.5
  Top Layer 1 w10: SW4.1@15799.29,9116.81 15800,9117.52 R4.2@15800,9260
NetR8_1: R8.1 SW4.3 | length 1820
  Top Layer 1 w5: R8.1@14220.28,9270 14232.54,9271.44 14390,9290 14645,9035 15834.77,9035 15856.25,9056.49 15856.25,9062.22 15866.57,9072.54 SW4.3@15872.31,9072.54
  Top Layer 1 w10: SW4.3@15872.31,9072.54 v1(15914.53,9072.54)
NetR8_2: R8.2 SW8.1 | length 155.9
  Top Layer 1 w5: R8.2@14175,9270 14182.36,9262.64 14182.36,9122.51 SW8.1@14178.54,9118.69
NetR72_1: R72.1 SW1.3 | length 2602.2
  Top Layer 1 w5: R72.1@17092.64,9260 17104.9,9259.15 v1(17165,9255) ; SW1.3@19582.58,9073.5 19597.79,9073.94 v1(19635,9075)
  Layer 3 w5: v1(17165,9255) 19399.8,9075.02 ccw(c19400.2,9080) 19400.2,9075 v1(19635,9075)
NetR72_2: R72.2 SW5.1 | length 143.8
  Top Layer 1 w10: SW5.1@17045.97,9116.81 17047.36,9118.2 R72.2@17047.36,9260
NetR73_1: R73.1 SW2.3 | length 1062.2
  Top Layer 1 w5: SW2.3@20407.69,9073.5 20408.16,9073.03 v1(20455.95,9073.03)
  Top Layer 1 w10: R73.1@19555.28,9260 19780,9260 v1(19960,9080)
  Layer 2 w5: v1(19960,9080) 20190,9080 20240,9030 20412.92,9030 v1(20455.95,9073.03)
NetR73_2: R73.2 SW1.1 | length 143.4
  Top Layer 1 w10: R73.2@19510,9260 19510,9117.34 SW1.1@19510.53,9116.81
NetR74_1: R74.1 SW3.3 | length 956.5
  Top Layer 1 w10: R74.1@20385.28,9260 20450,9260 20670,9040 21200.96,9040 21219.24,9058.28 21219.24,9062.22 21230.52,9073.5 SW3.3@21234.46,9073.5
NetR74_2: R74.2 SW2.1 | length 145
  Top Layer 1 w5: SW2.1@20335.64,9116.81 20340,9121.17 R74.2@20340,9260
NetR75_1: R75.1 SW7.3 | length 3625.4
  Top Layer 1 w5: SW7.3@18380.96,10218.18 18380.96,10214.24 18392.24,10202.97 18396.17,10202.97 18410,10189.14 18410,9890 18840,9460 v1(18840,9260)
  Top Layer 1 w10: R75.1@21205.28,9260 v1(21260,9260)
  Layer 2 w5: v1(18840,9260) v1(21260,9260)
NetR75_2: R75.2 SW3.1 | length 144.2
  Top Layer 1 w10: R75.2@21160,9260 21160,9119.22 SW3.1@21162.41,9116.81
NetR77_1: R77.1 SW6.3 | length 1072
  Top Layer 1 w5: R77.1@18180,10192.64 18189.31,10204.9 18390.08,10554.69 ccw(c18307.4,10602.23) 18402.77,10602.32 18402.24,11146.45 ccw(c18394.74,11146.44) 18401.99,11148.34 18392.24,11185.56 SW6.3@18380.96,11200.77
NetR77_2: R77.2 SW7.1 | length 158.2
  Top Layer 1 w5: R77.2@18180,10147.36 18336.42,10147.36 SW7.1@18337.65,10146.13
NetR103_2: R103.2 R104.1 | length 61.8
  Top Layer 1 w10: R103.2@15301.2,12172.11 15306.2,12177.11 R104.1@15360.93,12177.11
NetR139_2: R139.2 R140.1 | length 55.3
  Top Layer 1 w10: R139.2@15065,12172.48 15065.67,12171.81 R140.1@15120,12171.81
O\0\_IC101: IC11_IC101.2 R48_IC101.1 | length 466.1
  Top Layer 1 w5: v4(18887.72,11373.82) R48_IC101.1@18931.53,11373.82 ; v4(19252.72,11373.82) IC11_IC101.2@19310,11373.82
  Layer 3 w5: v4(18887.72,11373.82) v4(19252.72,11373.82)
O\0\_IC102: IC11_IC102.2 R48_IC102.1 | length 466.1
  Top Layer 1 w5: v4(20227.28,11393.82) R48_IC102.1@20271.1,11393.82 ; v4(20592.28,11393.82) IC11_IC102.2@20649.57,11393.82
  Layer 3 w5: v4(20227.28,11393.82) v4(20592.28,11393.82)
O\0\_IC103: IC11_IC103.2 R48_IC103.1 | length 428.8
  Top Layer 1 w5: v4(18940,9793.82) R48_IC103.1@18983.82,9793.82 ; v4(19267.72,9793.82) IC11_IC103.2@19325,9793.82
  Layer 3 w5: v4(18940,9793.82) v4(19267.72,9793.82)
O\0\_IC104: IC11_IC104.2 R48_IC104.1 | length 466.1
  Top Layer 1 w5: v4(20227.28,9793.82) R48_IC104.1@20271.1,9793.82 ; v4(20592.28,9793.82) IC11_IC104.2@20649.57,9793.82
  Layer 3 w5: v4(20227.28,9793.82) v4(20592.28,9793.82)
O\0\_IC105: IC11_IC105.2 R48_IC105.1 | length 466.1
  Top Layer 1 w5: v4(13415,9858.82) R48_IC105.1@13458.82,9858.82 ; v4(13780,9858.82) IC11_IC105.2@13837.28,9858.82
  Bottom 6+gnd w5: v4(13415,9858.82) v4(13780,9858.82)
O\1\_IC101: IC11_IC101.4 R47_IC101.1 | length 420
  Top Layer 1 w5: R47_IC101.1@18931.53,11428.82 18931.53,11426.85 18945.77,11412.62 18946.52,11412.62 18956.52,11402.62 19020.32,11402.62 19061.81,11444.11 19262.58,11444.11 19292.28,11473.82 IC11_IC101.4@19310,11473.82
O\1\_IC102: IC11_IC102.4 R47_IC102.1 | length 420
  Top Layer 1 w5: R47_IC102.1@20271.1,11448.82 20271.1,11446.85 20285.33,11432.62 20286.09,11432.62 20296.09,11422.62 20359.89,11422.62 20401.38,11464.11 20602.15,11464.11 20631.85,11493.82 IC11_IC102.4@20649.57,11493.82
O\1\_IC103: IC11_IC103.4 R47_IC103.1 | length 382.7
  Top Layer 1 w5: R47_IC103.1@18983.82,9848.82 18983.82,9846.85 18998.05,9832.62 18998.8,9832.62 19008.8,9822.62 19236.08,9822.62 19307.28,9893.82 IC11_IC103.4@19325,9893.82
O\1\_IC104: IC11_IC104.4 R47_IC104.1 | length 420
  Top Layer 1 w5: R47_IC104.1@20271.1,9848.82 20271.1,9846.85 20285.33,9832.62 20286.09,9832.62 20296.09,9822.62 20359.89,9822.62 20401.38,9864.11 20562.58,9864.11 20592.28,9893.82 IC11_IC104.4@20649.57,9893.82
O\1\_IC105: IC11_IC105.4 R47_IC105.1 | length 420
  Top Layer 1 w5: R47_IC105.1@13458.82,9913.82 13458.82,9911.85 13473.05,9897.62 13473.8,9897.62 13483.8,9887.62 13547.6,9887.62 13589.1,9929.11 13789.86,9929.11 13819.57,9958.82 IC11_IC105.4@13837.28,9958.82
O\2\_IC101: IC11_IC101.6 R49_IC101.1 | length 439.3
  Top Layer 1 w5: R49_IC101.1@18931.53,11628.82 18933.56,11630.84 18933.56,11652.09 18941.15,11659.68 19000.28,11659.68 19061.14,11598.82 19134.48,11598.82 19159.48,11573.82 IC11_IC101.6@19310,11573.82
O\2\_IC102: IC11_IC102.6 R49_IC102.1 | length 439.3
  Top Layer 1 w5: R49_IC102.1@20271.1,11648.82 20273.13,11650.84 20273.13,11672.09 20280.72,11679.68 20339.85,11679.68 20400.71,11618.82 20474.05,11618.82 20499.05,11593.82 IC11_IC102.6@20649.57,11593.82
O\2\_IC103: IC11_IC103.6 R49_IC103.1 | length 420.7
  Top Layer 1 w5: R49_IC103.1@18983.82,10048.82 18985.84,10050.84 18985.84,10072.09 18993.43,10079.68 19052.56,10079.68 19065,10067.25 19065,10036.75 19070.91,10030.84 19070.91,10029.43 19081.52,10018.82 19149.48,10018.82 19174.48,9993.82 IC11_IC103.6@19325,9993.82
O\2\_IC104: IC11_IC104.6 R49_IC104.1 | length 439.3
  Top Layer 1 w5: R49_IC104.1@20271.1,10048.82 20273.13,10050.84 20273.13,10072.09 20280.72,10079.68 20339.85,10079.68 20400.71,10018.82 20474.05,10018.82 20499.05,9993.82 IC11_IC104.6@20649.57,9993.82
O\2\_IC105: IC11_IC105.6 R49_IC105.1 | length 439.3
  Top Layer 1 w5: R49_IC105.1@13458.82,10113.82 13460.84,10115.84 13460.84,10137.09 13468.43,10144.68 13527.56,10144.68 13588.43,10083.82 13661.76,10083.82 13686.76,10058.82 IC11_IC105.6@13837.28,10058.82
PH_LOUT1_11: J4.1 J4.3 PJ1.26 | length 1213.6
  Unused w20: v1(14560,12450) 14784.83,12450 PJ1.26@14786.24,12448.59
  Layer 3 w20: v1(14560,12450) 14560,11867.48 v1(14700,11727.48)
  Bottom 6+gnd w10: J4.1@14630,11660 14690,11660 14700,11670 v1(14700,11727.48) 14688.74,11738.74 J4.3@14630,11738.74
PH_LOUT2_11: J4.7 J4.8 PJ1.6 | length 974.6
  Unused w20: v1(14635,12575) 14757.18,12575 PJ1.6@14758.68,12576.5
  Layer 3 w20: v1(14635,12575) 14635,11981.81 v1(14700.91,11915.91)
  Bottom 6+gnd w10: J4.7@14630,11896.22 14681.22,11896.22 v1(14700.91,11915.91) 14720.59,11935.59 J4.8@14777.64,11935.59
PH_ROUT1_11: J4.5 J4.6 PJ1.24 | length 1270.1
  Unused w20: v1(14595,12705) 14779.83,12705 PJ1.24@14786.24,12698.59
  Layer 3 w20: v1(14595,12705) 14595,11920 v1(14685,11830)
  Bottom 6+gnd w10: J4.5@14630,11817.48 14631.11,11818.59 14673.59,11818.59 v1(14685,11830) 14711.85,11856.85 J4.6@14777.64,11856.85
PH_ROUT2_11: J4.9 J4.10 PJ1.4 | length 1107
  Unused w20: v1(14675,12830) 14755.18,12830 PJ1.4@14758.68,12826.5
  Layer 3 w20: v1(14675,12830) 14675,12145 14721.24,12098.76 v1(14721.24,11991.24)
  Bottom 6+gnd w10: J4.9@14630,11974.96 14704.96,11974.96 v1(14721.24,11991.24) 14737.52,12007.52 14770.83,12007.52 J4.10@14777.64,12014.33
SAI1_FS: IC2.3 R143.1 | length 2800.4
  Top Layer 1 w5: v1(14853.33,11190.89) 14853.9,11190.32 14903.43,11190.32 IC2.3@14904,11189.75
  Layer 3 w5: v1(14853.33,11190.89) 14853.33,11193.19 15010.11,11349.97 15010.11,11920.31 15288.84,12199.04 16425.96,12199.04 16577.52,12047.48 16593.86,12047.48 16593.86,12064.16 16605,12075.3 16605,12080.86 16610,12085.86 16610,12105.86 16626.5,12122.36 16642.5,12122.36 16669.86,12095 v1(16670,12095)
  Bottom 6+gnd w5: v1(16670,12095) R143.1@16670,12144.72
SAI1_MCLK: IC2.1 R145.1 | length 2621.9
  Top Layer 1 w5: v1(14853.33,11230.26) 14853.9,11229.69 14903.43,11229.69 IC2.1@14904,11229.12
  Layer 3 w5: v1(14853.33,11230.26) 14918.93,11295.85 14926.57,11295.85 14990.11,11359.39 14990.11,11928.6 15280.56,12219.04 16455.96,12219.04 v1(16580,12095)
  Bottom 6+gnd w5: v1(16580,12095) R145.1@16580,12144.72
SAI1_SCK: IC2.4 R144.1 | length 2801.3
  Top Layer 1 w5: v1(14831.52,11170.65) 14831.81,11170.35 14903.71,11170.35 IC2.4@14904,11170.06
  Layer 3 w5: v1(14831.52,11170.65) 14833.58,11172.71 14856.89,11172.71 14933.48,11249.29 14933.48,11259.2 15020.11,11345.83 15020.11,11916.17 15292.98,12189.04 16420.96,12189.04 16584.4,12025.6 16602.07,12025.6 16605,12028.53 16605,12045 16625.37,12065.37 v1@16625.37,12094.63
  Bottom 6+gnd w5: R144.1@16625,12144.72 16625,12095.37 v1(16625.37,12095)
SAI1_SD_A: IC2.5 R141.1 | length 2880.1
  Top Layer 1 w5: v1(14853.33,11151.52) 14853.9,11150.95 14903.43,11150.95 IC2.5@14904,11150.38
  Layer 3 w5: v1(14853.33,11151.52) 14943.48,11241.66 14943.48,11255.05 15030.11,11341.69 15030.11,11912.03 15297.12,12179.04 16416.56,12179.04 16580,12015.6 16622.17,12015.6 16649.98,12043.41 16657.58,12043.41 16666.59,12052.42 16666.59,12060.02 16686.57,12080 16745,12080 v1(16760,12095)
  Bottom 6+gnd w5: v1(16760,12095) R141.1@16760,12144.72
SAI1_SD_B: IC2.2 R142.1 | length 2874.5
  Top Layer 1 w5: v1(14831.52,11210.02) 14831.81,11209.72 14903.71,11209.72 IC2.2@14904,11209.43
  Layer 3 w5: v1(14831.52,11210.02) 14833.58,11212.08 14856.93,11212.08 15000.11,11355.25 15000.11,11924.45 15284.7,12209.04 16440.96,12209.04 16495,12155 16497.16,12155 16583.86,12068.3 16595,12079.44 16595,12085 16600,12090 16600,12110 16624.65,12134.65 16652.42,12134.65 16655.35,12131.72 16655.35,12123.65 16668.63,12110.37 16699.63,12110.37 16714.63,12095.37 v1(16715,12095.37)
  Bottom 6+gnd w5: v1(16715,12095.37) R142.1@16715,12144.72
SAI2_SD_A: IC2.80 R146.1 | length 3622.7
  Top Layer 1 w5: v1(15695,10678.82) 15695.88,10677.94 IC2.80@15749.52,10677.94
  Unused w5: v1(15695,10678.82) 15640,10678.82 15575,10613.82 15060,10613.82 15041.02,10632.8 15041.02,11143.49 15010,11174.51 15010,11232.7 15025.31,11248.02 15025.31,11264.55 15029.88,11264.55 15035.33,11270 15050,11270 15164.57,11384.57 15230.25,11384.57 15237.62,11377.19 15301.33,11377.19 15359.14,11435 15509.14,11435 15570.32,11373.82 16142.96,11373.82 16249.14,11480 16349.14,11480 16505,11635.86 16505,12030 16485,12050 v1(16485,12060)
  Bottom 6+gnd w5: v1(16485,12060) 16535,12110 R146.1@16535,12144.72
SAI2_SD_B: IC2.34 R147.1 | length 3025.4
  Top Layer 1 w5: IC2.34@14904,10579.51 14953.39,10579.51 14963.7,10589.82 v1(14963.7,10590.1)
  Unused w5: v1(14963.7,10590.1) 15031.02,10657.42 15031.02,11122.8 14995,11158.82 14995,11231.84 15015.31,11252.16 15015.31,11278.33 15029.52,11278.33 15031.19,11280 15041.48,11280 15158.59,11397.11 15248.57,11397.11 15258.49,11387.19 15297.19,11387.19 15355,11445 15513.28,11445 15574.47,11383.82 16138.82,11383.82 16245,11490 16345,11490 16495,11640 16495,12018.13 16461.39,12051.75 16461.39,12065.35 v1(16460.12,12066.62)
  Bottom 6+gnd w5: v1(16460.12,12066.62) 16460.12,12114.84 16477.74,12132.46 16480.69,12132.46 16490,12141.77 R147.1@16490,12144.72
SD_CK: H4.5 IC1.113 | length 2676
  Top Layer 1 w5: IC1.113@16900.75,11311.57 16901.42,11312.24 16901.42,11359.67 v1(16902.09,11360.34)
  Unused w5: v1(16902.09,11360.34) 16974.99,11360.34 17079.14,11464.5 17160.99,11464.5 17660.13,11963.64 18054.14,11963.64 18230,12139.5 18230,12960 H4.5@18340,13070
SD_CMD: H4.6 IC1.116 | length 2835.8
  Top Layer 1 w5: IC1.116@16841.69,11311.57 16841.89,11311.77 16841.89,11366.99 v1(16842.11,11367.21)
  Unused w5: v1(16842.11,11367.21) 16844.17,11369.27 16849.68,11369.27 16850.41,11370 16890,11370 16895.72,11375.71 16908.45,11375.71 16913.83,11370.34 16970.34,11370.34 17079.44,11479.44 17161.79,11479.44 17655.99,11973.64 18050,11973.64 18220,12143.64 18220,13050 H4.6@18340,13170
SD_D0: H4.1 IC1.98 | length 2640.3
  Top Layer 1 w5: v1(16925.27,11236.65) 16924.1,11235.49 16924.1,11208.83 16941.02,11191.91 16941.02,11105.83 17004.11,11042.74 17028.35,11042.74 17034.63,11036.46 IC1.98@17057.76,11036.46
  Unused w5: v1(16925.27,11236.65) 16928.23,11236.65 16946.67,11218.22 16949.3,11218.22 16952.18,11215.35 16954.79,11215.35 16958.63,11219.19 16960.37,11219.19 16983.01,11241.83 16988.45,11241.83 16997.46,11250.84 16997.46,11263.57 16985.97,11275.06 16985.97,11310.11 17087.93,11412.07 17167.35,11412.07 17677.35,11922.07 18050,11922.07 18051.57,11923.64 18070.71,11923.64 18271.57,12124.5 18271.57,12601.57 H4.1@18340,12670
SD_D1: H4.2 IC1.99 | length 2641.6
  Top Layer 1 w5: v1(16953.03,11233.59) 16952.18,11232.74 16952.18,11212.74 16949.63,11210.19 16949.63,11197.45 16952.18,11194.9 16952.18,11108.81 16998.57,11062.42 17028.35,11062.42 17034.63,11056.14 IC1.99@17057.76,11056.14
  Unused w5: v1(16953.03,11233.59) 16966.71,11247.27 16966.71,11305 17092.5,11430.78 17169.7,11430.78 17672.56,11933.64 18066.57,11933.64 18260,12127.07 18260,12690 H4.2@18340,12770
SD_D2: H4.3 IC1.111 | length 2518.9
  Top Layer 1 w5: IC1.111@16940.12,11311.57 16940.12,11270.42 v1(16951.25,11259.28)
  Unused w5: v1(16951.25,11259.28) 16951.25,11303.68 17088.79,11441.21 17165.99,11441.21 17668.42,11943.64 18062.43,11943.64 18250,12131.21 18250,12780 H4.3@18340,12870
SD_D3: H4.4 IC1.112 | length 2623.2
  Top Layer 1 w5: IC1.112@16920.43,11311.57 16921.26,11310.75 16921.26,11263.03 v1(16922.09,11262.2)
  Unused w5: v1(16922.09,11262.2) 16922.09,11292.09 17083.64,11453.64 17164.27,11453.64 17664.28,11953.64 18058.28,11953.64 18240,12135.36 18240,12870 H4.4@18340,12970
SD_DETECT: H1.1 IC1.102 | length 3259.9
  Top Layer 1 w5: v1(16965,11203.82) 16965,11158.82 17005,11118.82 17007.91,11118.82 17010.53,11116.2 17056.75,11116.2 IC1.102@17057.76,11115.2
  Top Layer 1 w10: v1(18294.31,12541.7) 19026.52,12541.7 H1.1@19154.81,12669.99
  Unused w5: v1(16965,11203.82) 16975,11213.82 16986.35,11213.82 16991.01,11209.15 17003.75,11209.15 17012.76,11218.16 17012.76,11230.89 17010,11233.65 17010,11320 17090,11400 17172.35,11400 17682.35,11910 18071.21,11910 18283.64,12122.43 18283.64,12500 18284,12500 18294.31,12510.31 v1(18294.31,12541.7)
SDCKE_0_6: IC1.29 U1.37 | length 2696.1
  Top Layer 1 w5: IC1.29@16212.26,10682.1 v1(16291.01,10682.08) ; U1.37@16499.02,9775.59 v1@16499.02,9837.43 ; U1.37@16499.26,9775.83 v1(16499.26,9837.68) ; U1.37@16499.51,9775.59 v1@16499.51,9837.43
  Layer 3 w5: 16246.67,9678.13 16215.27,9678.24 ; 16246.7,9678.13 16481.53,9677.96 ccw(c16481.53,9682.96) 16485.01,9679.38 ; v1(16291.01,10682.08) 16291.01,10643.82 16290.98,10575.75 ; 16485.04,9679.4 16515,9709.36 16515,9819.87 ; v1(16499.26,9837.68) 16513.54,9823.35 cw(c16510,9819.82) 16515,9819.91 ; 16178.57,10459.23 cw(c16183.57,10459.2) 16179.99,10462.68 ; 16178.57,10459.23 cw(c16183.57,10459.2) 16179.99,10462.68 ; 16178.57,10459.23 cw(c16183.57,10459.2) 16179.99,10462.68 ; 16178.57,10459.23 cw(c16183.57,10459.2) 16179.99,10462.68 ; 16178.57,10459.23 cw(c16183.57,10459.2) 16179.99,10462.68 ; 16178.57,10459.23 cw(c16183.57,10459.2) 16179.99,10462.68 ; 16178.57,10459.23 cw(c16183.57,10459.2) 16179.99,10462.68 ; 16178.57,10459.23 cw(c16183.57,10459.2) 16179.99,10462.68 ; 16178.57,10459.23 cw(c16183.57,10459.2) 16179.99,10462.68 ; 16178.57,10459.23 cw(c16183.57,10459.2) 16179.99,10462.68 ; 16178.57,10459.23 cw(c16183.57,10459.2) 16179.99,10462.68 ; 16178.57,10459.23 cw(c16183.57,10459.2) 16179.99,10462.68 ; 16178.57,10459.23 cw(c16183.57,10459.2) 16179.99,10462.68 ; 16178.57,10459.23 cw(c16183.57,10459.2) 16179.99,10462.68 ; 16178.57,10459.23 cw(c16183.57,10459.2) 16179.99,10462.68 ; 16178.57,10459.23 cw(c16183.57,10459.2) 16179.99,10462.69 ; 16178.57,10459.23 16178.55,10454.58 ccw(c16193.55,10454.49) 16178.55,10454.49 16178.55,10450.32 16180.05,9713.54 ; 16180.01,10462.71 16289.55,10572.24 ; 16180.05,9713.55 ccw(c16215.42,9713.62) 16215.27,9678.24 ; 16180.05,9713.55 ccw(c16215.42,9713.62) 16215.27,9678.24 ; 16180.05,9713.55 ccw(c16215.42,9713.62) 16215.27,9678.24 ; 16180.05,9713.55 ccw(c16215.42,9713.62) 16215.27,9678.24 ; 16180.05,9713.55 ccw(c16215.42,9713.62) 16215.27,9678.24 ; 16180.05,9713.55 ccw(c16215.42,9713.62) 16215.27,9678.24 ; 16180.05,9713.55 ccw(c16215.42,9713.62) 16215.27,9678.24 ; 16180.05,9713.55 ccw(c16215.42,9713.62) 16215.27,9678.24 ; 16180.05,9713.55 ccw(c16215.42,9713.62) 16215.27,9678.24 ; 16180.05,9713.55 ccw(c16215.42,9713.62) 16215.27,9678.24 ; 16180.05,9713.55 ccw(c16215.42,9713.62) 16215.27,9678.24 ; 16180.05,9713.55 ccw(c16215.42,9713.62) 16215.27,9678.24 ; 16180.05,9713.55 ccw(c16215.42,9713.62) 16215.27,9678.24 ; 16180.05,9713.55 ccw(c16215.42,9713.62) 16215.27,9678.24 ; 16180.05,9713.55 ccw(c16215.42,9713.62) 16215.27,9678.24 ; 16180.05,9713.55 ccw(c16215.42,9713.62) 16215.27,9678.24 ; 16289.57,10572.27 ccw(c16285.98,10575.75) 16290.98,10575.75 ; 16289.57,10572.27 ccw(c16285.98,10575.75) 16290.98,10575.75 ; 16289.57,10572.27 ccw(c16285.98,10575.75) 16290.98,10575.75 ; 16289.57,10572.27 ccw(c16285.98,10575.75) 16290.98,10575.75 ; 16289.57,10572.27 ccw(c16285.98,10575.75) 16290.98,10575.75 ; 16289.57,10572.27 ccw(c16285.98,10575.75) 16290.98,10575.75 ; 16289.57,10572.27 ccw(c16285.98,10575.75) 16290.98,10575.75 ; 16289.57,10572.27 ccw(c16285.98,10575.75) 16290.98,10575.75